# Allegro board test_fix_2.brd

Outline 87.88 x 112.52 mm; copper layers: TOP, POWER, MIDDLE, GND, BOTTOM. Coordinates in mm from the lower left corner of the outline.
Outline path: rectangle 0,0 87.88,112.52

## Design rules (mm)
nets with their own width: min track width 0.127; nets MISO2 MOSI1 MOSI2 N119290 N119334 N119492 N119544 N119576 N119584 N172861 N172869 N172885 N174712 N174716 N174732 N174736 N174786 N174790 OUTA PTA1 PTA2 PTA3 PTA4 PTA5 PTA6 PTA7 PTB2 PTB3 PTB4 PTB5 PTC0 PTC1 PTC2 PTC3 PTC4 PTC5 PTD4 PTD5 PTD6 PTD7 PTE2 PTE4 PTE5 PTE6 PTE7 PTF0 PTF1 PTF2 PTF3 PTF4 PTF5 PTF6 PTF7 PTG0 PTG1 PTG2 PTG3 PTH0 PTH1 R1IN R1OUT R2IN R2OUT SCL1 SCL2 SDA1 SDA2 SPSCK1 SPSCK2 SS1_N SS2_N T1OUT T2OUT TXD1 TXD2 VIN VOUT
nets with their own width: min track width 0.178; nets V3_3 V5_5 VCC
nets with their own width: min track width 0.229; nets AGND VREFL VSS

## Placement (name value [footprint] x y rotation side)
C7  0.1u  [CAP196]  25.91 55.12 0 top
C8  0.1u  [CAP196]  65.53 47.5 180 top
C14  2u  [CAP196]  11.68 75.18 180 top
C15  0.1u  [CAP196]  13.97 97.79 270 top
C16  0.1u  [CAP196]  21.08 97.79 270 top
C17  0.1u  [CAP196]  30.73 97.79 90 top
C18  10u  [CAP196]  56.39 55.12 0 top
C19  0.1u  [CAP196]  35.31 97.79 270 top
C20  10u  [CAP196]  42.42 97.79 270 top
C21  0.1u  [CAP196]  53.34 75.69 0 top
C22  0.1u  [CAP196]  32.77 55.12 0 top
C26  10u  [CAP196]  61.47 75.69 0 top
C27  0.47u  [CAP196]  61.47 68.58 0 top
C28  33u  [CAP196]  53.34 71.12 180 top
C29  0.1u  [CAP196]  56.39 29.46 180 top
C30  0.1u  [CAP196]  56.39 22.1 180 top
C31  0.1u  [CAP196]  56.39 37.59 180 top
C32  0.1u  [CAP196]  56.39 10.67 0 top
C33  1n  [CAP196]  49.28 55.12 0 top
C34  10u  [CAP196]  44.7 64.26 180 top
C35  0.1u  [CAP196]  65.53 57.66 180 top
D4  LED  [CAP196]  21.84 81.79 0 top
D5  LED  [CAP196]  29.97 81.79 0 top
D6  LED  [CAP196]  38.1 81.79 0 top
J1  CON2  [JUMPER2]  18.03 72.64 90 top
J2  HEADER 8  [JUMPER8]  9.14 13.72 0 top
J3  HEADER 8  [JUMPER8]  9.14 27.94 0 top
J4  HEADER 8  [JUMPER8]  9.14 42.16 0 top
J5  HEADER 8  [JUMPER8]  9.14 56.39 0 top
J6  HEADER 8  [JUMPER8]  76.2 13.72 0 top
J7  HEADER 8  [JUMPER8]  76.2 27.94 0 top
J8  HEADER 8  [JUMPER8]  76.2 42.16 0 top
J9  HEADER 8  [JUMPER8]  76.2 56.39 0 top
J10  HEADER 8  [JUMPER8]  68.07 69.34 0 top
NOREF  -  [unnamed]  85.34 2.54 0 top
NOREF#2  -  [unnamed]  85.34 109.98 0 top
NOREF#3  -  [unnamed]  2.54 2.54 0 top
NOREF#4  -  [unnamed]  2.54 109.98 0 top
NOREF#5  -  [#2]  87.88 0 90 top
NOREF#6  -  [#2]  0 112.52 0 top
R4  1k  [RES400]  37.59 68.33 0 top
R5  100k  [RES400]  13.72 92.46 270 top
R6  100k  [RES400]  38.1 92.46 90 top
R7  1.26k  [RES400]  52.07 92.46 90 top
R8  22.17k  [RES400]  38.1 103.38 90 top
R9  11.1k  [RES400]  41.91 103.38 270 top
R10  10k  [RES400]  18.29 32.26 180 top
R11  10k  [RES400]  18.29 46.99 180 top
R12  10k  [RES400]  36.83 41.91 0 top
R13  10k  [RES400]  42.67 41.91 0 top
R14  10k  [RES400]  71.63 52.07 180 top
R16  1k  [RES400]  59.94 52.07 180 top
R17  1k  [RES400]  22.86 77.98 180 top
U2  MC9S08QE128_64  [MC9S08QE128_V2]  17.27 31.5 0 top
U3  CAT24C02  [DIP8_3]  24.38 50.55 0 top
U4  LT323/TO220  [TO220AB]  30.23 70.36 270 top
U5  LM3940/TO220  [TO220AB]  44.2 75.69 90 top
U6  max550acpa  [DIP8_3]  47.75 50.55 0 top
U7  MAX3222  [DIP18_3]  63.25 35.56 0 top
U8  LM124A  [DIP14_3]  58.17 93.98 90 top

## Library data of the parts
C7 C8 C14-C22 C26-C28 C35 = C: Tolerance: ***; User Part Number: ***
C29-C34 = CAP: Tolerance: ***; User Part Number: ***
D4-D6 = LED: Tolerance: ***; User Part Number: ***
J1 = CON2: User Part Number: ***
J2-J10 = HEADER 8: User Part Number: ***
R4-R9 R16 R17 = R: Tolerance: ***; User Part Number: ***
R10-R14 = RESISTOR: Tolerance: ***; User Part Number: ***
U2 = MC9S08QE128_7
U3 = CAT24C02_3: Tolerance: ***; User Part Number: ***
U4 = LT323/TO220_0
U5 = LM3940/TO220_0
U6 = max550acpa_0: Tolerance: ***; User Part Number: ***
U7 = MAX3222_2: Tolerance: ***; User Part Number: ***
U8 = LM124A: Tolerance: ***; User Part Number: ***

## Footprints (pads in the part's own frame, mm; a bottom-side part is the same pattern mirrored in y, then rotated)
CAP196
  round 1.524 hole 0.914: 1(0,0) 2(0,2.54)
DIP8_3
  rect 1.524x1.524 hole 0.914: 1(0,0)
  round 1.524 hole 0.914: 2(0,-2.54) 3(0,-5.08) 4(0,-7.62) 5(7.62,-7.62) 6(7.62,-5.08) 7(7.62,-2.54) 8(7.62,0)
DIP14_3
  rect 1.524x1.524 hole 0.914: 1(0,0)
  round 1.524 hole 0.914: 2(0,-2.54) 3(0,-5.08) 4(0,-7.62) 5(0,-10.16) 6(0,-12.7) 7(0,-15.24) 8(7.62,-15.24) 9(7.62,-12.7) 10(7.62,-10.16) 11(7.62,-7.62) 12(7.62,-5.08) 13(7.62,-2.54) 14(7.62,0)
DIP18_3
  rect 1.524x1.524 hole 0.914: 1(0,0)
  round 1.524 hole 0.914: 2(0,-2.54) 3(0,-5.08) 4(0,-7.62) 5(0,-10.16) 6(0,-12.7) 7(0,-15.24) 8(0,-17.78) 9(0,-20.32) 10(7.62,-20.32) 11(7.62,-17.78) 12(7.62,-15.24) 13(7.62,-12.7) 14(7.62,-10.16) 15(7.62,-7.62) 16(7.62,-5.08) 17(7.62,-2.54) 18(7.62,0)
JUMPER2
  round 1.524 hole 0.914: 1(0,0) 2(2.54,0)
JUMPER8
  round 1.524 hole 0.914: 1(0,0) 2(2.54,0) 3(0,2.54) 4(2.54,2.54) 5(0,5.08) 6(2.54,5.08) 7(0,7.62) 8(2.54,7.62)
MC9S08QE128_V2
  round 1.524 hole 1.067: 1(8.026,0) 2(10.033,0) 3(8.026,-2.007) 4(10.033,-2.007) 5(8.026,-4.013) 6(10.033,-4.013) 7(8.026,-6.02) 8(10.033,-6.02) 9(8.026,-8.026) 10(10.033,-8.026) 11(8.026,-10.033) 12(10.033,-10.033) 13(8.026,-12.04) 14(10.033,-12.04) 15(8.026,-14.046) 16(10.033,-14.046) 17(12.04,-20.066) 18(12.04,-18.059) 19(14.046,-20.066) 20(14.046,-18.059) 21(16.053,-20.066) 22(16.053,-18.059) 23(18.059,-20.066) 24(18.059,-18.059) 25(20.066,-20.066) 26(20.066,-18.059) 27(22.073,-20.066) 28(22.073,-18.059) 29(24.079,-20.066) 30(24.079,-18.059) 31(26.086,-20.066) 32(26.086,-18.059) 33(32.664,-14.046) 34(30.658,-14.046) 35(32.664,-12.04) 36(30.658,-12.04) 37(32.664,-10.033) 38(30.658,-10.033) 39(32.664,-8.026) 40(30.658,-8.026) 41(32.664,-6.02) 42(30.658,-6.02) 43(32.664,-4.013) 44(30.658,-4.013) 45(32.664,-2.007) 46(30.658,-2.007) 47(32.664,0) 48(30.658,0) 49(26.086,5.359) 50(26.086,3.353) 51(24.079,5.359) 52(24.079,3.353) 53(22.073,5.359) 54(22.073,3.353) 55(20.066,5.359) 56(20.066,3.353) 57(18.059,5.359) 58(18.059,3.353) 59(16.053,5.359) 60(16.053,3.353) 61(14.046,5.359) 62(14.046,3.353) 63(12.04,5.359) 64(12.04,3.353)
RES400
  round 1.651 hole 1.067: 1(0,0) 2(0,10.16)
TO220AB
  round 2.032 hole 1.397: 1(0,0) 2(-2.54,0) 3(-5.08,0)
unnamed
  round 0.635 hole 3.175 unplated: (0,0)

## Nets
AGND: C14.1 C15.1 C16.1 C21.1 C26.1 C27.1 C28.1 C31.2 C32.2 C33.2 C35.1 D4.2(CATHODE) D5.2(CATHODE) D6.2(CATHODE) J1.2 J10.1 R6.1 U4.2 U5.2 U6.1(GND) U7.16 U8.11(V-)
V3_3: C7.2 C22.2 C28.2 C33.1 C34.1 C35.2 J2.6 J2.7 J2.8 J10.3 J10.4 J10.5 R10.1 R11.1 R12.2 R13.2 R14.1 R16.2 U2.6(VDD) U2.7(VDDAD) U2.8(VREFH) U2.40(VDD_2) U3.8 U5.3(OUT) U6.6(LDAC_N) U6.7(REF) U6.8(VDD) U7.1(E\N\) U7.17(VCC) U7.18(S\H\D\N\)
V5_5: C21.2 C26.2 C27.2 J10.6 J10.7 J10.8 R4.2 R5.2 U4.3(VOUT) U5.1(IN) U8.4(V+)
VCC: C14.2 J1.1 R17.2 U4.1(VIN)
VIN: C18.1 J9.8
VSS: U2.41 U3.4
MISO2: J6.6 U2.46(PTD2/KBI2P2/MISO2)
MOSI1: J9.4 U2.59(PTE1/MOSI1) U6.4(DIN)
MOSI2: J2.1 U2.1(PTD1/KBI2P1/MOSI2)
OUTA: J10.2 U6.2(OUTA)
PTA1: J7.1 U2.49(PTA1/KBI1P1/TPM2CH0/ADP1/ACMP1)
PTA2: J6.8 U2.48(PTA2/KBI1P2/SDA11/ADP2)
PTA3: J6.7 U2.47(PTA3/KBI1P3/SCL1/ADP3)
PTA4: J8.1 U2.64(PTA4/ACMP1O/BKGD/MS)
PTA5: C8.2 J7.8 R14.2 U2.63(PTA5/IRQ/TPM1CLK/R\E\S\E\T\\)
PTA6: J5.8 U2.38(PTA6/TPM1CH2/ADP8)
PTA7: J8.5 U2.37(PTA7/TPM2CH2/ADP9)
PTB2: J9.3 U2.32(PTB2/KBI1P6/SPSCK1/ADP6)
PTB3: J9.2 U2.31(PTB3/KBI1P7/MOSI1/ADP7)
PTB4: J4.3 U2.19(PTB4/TPM2CH1/MISO1)
PTB5: J4.2 U2.18(PTB5/TPM1CH1/SS1\)
PTC0: J5.2 U2.26(PTC0/TPM3CH0)
PTC1: J5.1 U2.25(PTC1/TPM3CH1)
PTC2: J4.5 U2.21(PTC2/TPM3CH2)
PTC3: J4.4 U2.20(PTC3/TPM3CH3)
PTC4: J9.6 U2.62(PTC4/TPM3CH4/R\S\T\O\)
PTC5: J9.7 U2.61(PTC5/TPM3CH5/ACMP2O)
PTD4: J6.5 U2.44(PTD4/KBI2P4)
PTD5: J4.8 U2.24(PTD5/KBI2P5)
PTD6: J4.7 U2.23(PTD6/KBI2P6)
PTD7: J4.6 U2.22(PTD7/KBI2P7)
PTE2: J5.7 U2.54(PTE2/MISO1)
PTE4: J8.2 U2.39(PTE4)
PTE5: J4.1 U2.17(PTE5)
PTE6: J3.8 U2.16(PTE6)
PTE7: J2.5 U2.5(PTE7/TPM3CLK)
PTF0: J8.8 U2.43(PTF0/ADP10)
PTF1: J8.7 U2.42(PTF1/ADP11)
PTF2: J6.4 U2.36(PTF2/ADP12)
PTF3: J6.3 U2.35(PTF3/ADP13)
PTF4: J9.1 U2.30(PTF4/ADP14)
PTF5: J8.4 U2.29(PTF5/ADP15)
PTF6: J8.3 U2.28(PTF6/ADP16)
PTF7: J5.3 U2.27(PTF7/ADP17)
PTG0: J5.6 U2.58(PTG0)
PTG1: J5.5 U2.57(PTG1)
PTG2: J5.4 U2.56(PTG2/ADP18)
PTG3: J7.7 U2.55(PTG3/ADP19)
PTH0: J3.7 U2.15(PTH0)
PTH1: J3.6 U2.14(PTH1)
R1IN: J6.2 U7.14(R1IN)
R1OUT: U2.34(PTB0/KBI1P4/RXD1/ADP4) U7.13(R1OUT)
R2IN: J7.5 U7.9(R2IN)
R2OUT: U2.52(PTC6/RXD2/ACMP2+) U7.10(R2OUT)
SCL1: J3.4 R11.2 U2.12(PTB7/SCL1/EXTAL)
SCL2: J2.4 R13.1 U2.4(PTH6/SCL2) U3.6(SCL)
SDA1: J3.5 R10.2 U2.13(PTB6/SDA1/XTAL)
SDA2: J2.3 R12.1 U2.3(PTH7/SDA2) U3.5(SDA)
SPSCK1: J9.5 U2.60(PTE0/TPM2CLK/SPSCK1) U6.5(SCLK)
SPSCK2: J2.2 U2.2(PTD0/KBI2P0/SPSCK2)
SS1_N: J7.6 U2.53(PTE3/S\S\1\) U6.3(CS_N)
SS2_N: J7.2 U2.45(PTD3/KBI2P3/S\S\2\)
T1OUT: J6.1 U7.15(T1OUT)
T2OUT: J7.4 U7.8(T2OUT)
TXD1: U2.33(PTB1/KBI1P5/TXD1/ADP5) U7.12(T1IN)
TXD2: U2.51(PTC7/TXD2/ACMP2-) U7.11(T2IN)
VOUT: C20.2 J7.3 U2.50(PTA0/KBI1P0/TPM1CH0/ADP0/ACMP1)
VREFL: C7.1 C8.1 C22.1 C34.2 J3.1 J3.2 J3.3 J8.6 U2.9(VREFL) U2.10(VSSAD) U2.11(VSS_2) U3.1(A0) U3.2(A1) U3.3(A2)
N119290: C15.2 R5.1 R6.2 U8.2(-)
N119334: C16.2 R7.2 U8.1(OUT) U8.3(+) U8.5(+)
N119492: C17.1 C19.1 R7.1 R9.1
N119544: C17.2 R8.2 U8.6(-)
N119576: C19.2 C20.1 R8.1 U8.7(OUT)
N119584: C18.2 R9.2
N172861: D4.1(ANODE) R17.1
N172869: D6.1(ANODE) R16.1
N172885: D5.1(ANODE) R4.1
N174712: C29.1 U7.2(C1+)
N174716: C29.2 U7.4(C1-)
N174732: C30.1 U7.5(C2+)
N174736: C30.2 U7.6(C2-)
N174786: C31.1 U7.3(V+)
N174790: C32.1 U7.7(V-)

Pads without a net: U3 7; U8 8 9 10 12 13 14

## Via types
v1: diameter 0.61, hole 0.33, TOP to BOTTOM, 46 vias

## Routing (per net, layer and track width the routed paths; a pad name or vN(x,y) marks a point on that pad's centre or on a via; arc(x,y) is an arc through that point)
AGND: length 319.7
  TOP w0.229: 28.97,84.33 D5.2 D6.2 ; 28.97,84.33 D4.2 ; 28.97,84.33 28.97,74.16 U4.2 33.45,72.9 33.49,72.86 43.9,72.86 U5.2 53.34,73.15 ; 62.66,69.34 62.66,74.5 C26.1 C21.1 53.34,73.15 ; 62.66,69.34 61.9,68.58 C27.1 ; 62.66,69.34 J10.1 ; 53.34,73.15 C28.1 ; C31.2 56.39,34.02 ; 56.39,34.02 67.09,34.02 70.64,30.48 U7.16 ; 56.39,34.02 v1(46.3,34.02) ; C15.1 14.97,98.79 20.08,98.79 C16.1 ; J1.2 C14.1
  MIDDLE w0.229: 20.14,84.33 18.03,82.22 J1.2 ; 20.14,84.33 D4.2 ; 20.14,84.33 20.14,96.85 C16.1 ; C26.1 64.54,78.77 64.54,100.36 U8.11 ; v1(46.3,34.02) 46.3,49.1 U6.1 47.75,56.13 C33.2 ; C32.2 55.45,14.15 55.45,34.11 C31.2 ; D6.2 R6.1
  GND w0.229: 60.59,75.69 C26.1 ; C26.1 61.47,74.82 ; C26.1 62.34,75.69 ; C31.2 57.26,35.05 ; C31.2 55.51,35.05 ; C31.2 56.39,35.93 ; C31.2 56.39,34.18 ; 37.22,84.33 D6.2 ; D6.2 38.1,83.45 ; D6.2 38.1,85.2 ; D6.2 38.98,84.33 ; C15.1 14.85,97.79 ; C15.1 13.09,97.79 ; C15.1 13.97,98.67 ; C15.1 13.97,96.91 ; 53.34,74.82 C21.1 ; C21.1 53.34,76.57 ; C21.1 54.22,75.69 ; C21.1 52.46,75.69 ; U6.1 48.63,50.55 ; U6.1 47.75,49.67 ; U6.1 46.88,50.55 ; U6.1 47.75,51.42 ; 48.4,57.66 C33.2 ; C33.2 49.28,58.53 ; C33.2 49.28,56.78 ; C33.2 50.15,57.66 ; U8.11 65.79,102.48 ; U8.11 66.66,101.6 ; U8.11 65.79,100.72 ; U8.11 64.91,101.6 ; C16.1 21.08,98.67 ; C16.1 21.08,96.91 ; C16.1 21.96,97.79 ; C16.1 20.21,97.79 ; 29.1,84.33 D5.2 ; D5.2 29.97,83.45 ; D5.2 30.85,84.33 ; D5.2 29.97,85.2 ; 37.22,92.46 R6.1 ; R6.1 38.1,91.58 ; R6.1 38.98,92.46 ; R6.1 38.1,93.33 ; 29.22,72.9 U4.2 ; U4.2 30.23,73.9 ; U4.2 31.23,72.9 ; U4.2 30.23,71.89 ; D4.2 21.84,85.2 ; D4.2 20.97,84.33 ; D4.2 21.84,83.45 ; D4.2 22.72,84.33 ; C27.1 62.34,68.58 ; C27.1 61.47,67.7 ; C27.1 61.47,69.46 ; C27.1 60.59,68.58 ; C28.1 54.22,71.12 ; C28.1 53.34,70.24 ; C28.1 53.34,72 ; C28.1 52.46,71.12 ; 55.51,13.21 C32.2 ; C32.2 56.39,12.33 ; C32.2 57.26,13.21 ; C32.2 56.39,14.08 ; J1.2 18.03,76.06 ; J1.2 17.16,75.18 ; J1.2 18.03,74.31 ; J1.2 18.91,75.18 ; 65.53,56.78 C35.1 ; C35.1 64.66,57.66 ; C35.1 65.53,58.53 ; C35.1 66.41,57.66 ; 67.2,69.34 J10.1 ; J10.1 68.95,69.34 ; J10.1 68.07,68.47 ; U5.2 45.2,73.15 ; U5.2 44.2,74.16 ; U5.2 43.19,73.15 ; U5.2 44.2,72.15 ; C14.1 11.68,76.06 ; C14.1 12.56,75.18 ; C14.1 10.81,75.18 ; C14.1 11.68,74.31 ; U7.16 70.87,31.36 ; U7.16 70.87,29.6 ; U7.16 71.74,30.48 ; U7.16 69.99,30.48
  BOTTOM w0.229: C28.1 49.28,67.06 C33.2
V3_3: length 211.6
  TOP w0.178: v1(51.75,68.58) C28.2 ; v1(61.53,41.91) R16.2 ; U5.3 45.39,70.61 45.43,70.57 v1(51.52,70.57) ; C22.2 31.79,56.68 23,56.68 22.8,56.88 v1(22.28,56.88) ; v1(16.7,46.99) R11.1 ; v1(22.8,52.07) R12.2 ; v1(61.66,35.56) U7.1 ; v1(73.22,35.56) U7.18 ; v1(7.51,21.34) J2.7 ; v1(73.22,33.02) U7.17 ; v1(19.93,32.26) R10.1 ; v1(14.77,18.8) J2.6 ; v1(73.22,52.07) R14.1
  POWER w0.178: R13.2 42.67,52.95 ; R13.2 41.8,52.07 ; R13.2 43.55,52.07 ; R13.2 42.67,51.19 ; 27.31,26.61 U2.6 ; U2.6 28.18,27.48 ; U2.6 27.31,28.36 ; U2.6 26.43,27.48 ; J2.8 11.68,22.21 ; J2.8 11.68,20.46 ; J2.8 10.81,21.34 ; J2.8 12.56,21.34 ; U7.18 70.87,36.44 ; U7.18 69.99,35.56 ; U7.18 71.74,35.56 ; U7.18 70.87,34.68 ; 70.61,71.01 J10.4 ; J10.4 69.74,71.88 ; J10.4 70.61,72.76 ; J10.4 71.49,71.88 ; 31.89,57.66 C22.2 ; C22.2 33.64,57.66 ; C22.2 32.77,56.78 ; C22.2 32.77,58.53 ; R12.2 36.83,52.95 ; R12.2 36.83,51.19 ; R12.2 37.71,52.07 ; R12.2 35.95,52.07 ; 54.5,48.01 U6.7 ; U6.7 55.37,48.88 ; U6.7 56.25,48.01 ; U6.7 55.37,47.13 ; 25.03,57.66 C7.2 ; C7.2 25.91,56.78 ; C7.2 26.78,57.66 ; C7.2 25.91,58.53 ; 8.27,21.34 J2.7 ; J2.7 9.14,20.46 ; J2.7 9.14,22.21 ; J2.7 10.02,21.34 ; 68.07,71.01 J10.3 ; J10.3 67.2,71.88 ; J10.3 68.95,71.88 ; J10.3 68.07,72.76 ; 68.07,73.55 J10.5 ; J10.5 68.95,74.42 ; J10.5 68.07,75.3 ; J10.5 67.2,74.42 ; 63.25,34.68 U7.1 ; U7.1 63.25,36.44 ; U7.1 62.37,35.56 ; U7.1 64.12,35.56 ; U5.3 44.2,71.62 ; U5.3 44.2,69.61 ; U5.3 43.19,70.61 ; U5.3 45.2,70.61 ; 65.53,54.24 C35.2 ; C35.2 65.53,55.99 ; C35.2 64.66,55.12 ; C35.2 66.41,55.12 ; R11.1 19.16,46.99 ; R11.1 18.29,47.87 ; R11.1 17.41,46.99 ; R11.1 18.29,46.11 ; U2.40 47.93,24.35 ; U2.40 47.05,23.47 ; U2.40 47.93,22.59 ; U2.40 48.81,23.47 ; U6.6 56.25,45.47 ; U6.6 55.37,46.34 ; U6.6 55.37,44.59 ; U6.6 54.5,45.47 ; C28.2 54.22,68.58 ; C28.2 52.46,68.58 ; C28.2 53.34,69.46 ; C28.2 53.34,67.7 ; C34.1 44.7,65.14 ; C34.1 43.83,64.26 ; C34.1 45.58,64.26 ; C34.1 44.7,63.39 ; R10.1 18.29,33.13 ; R10.1 19.16,32.26 ; R10.1 17.41,32.26 ; R10.1 18.29,31.38 ; R14.1 72.5,52.07 ; R14.1 70.75,52.07 ; R14.1 71.63,52.95 ; R14.1 71.63,51.19 ; R16.2 60.82,41.91 ; R16.2 59.94,42.79 ; R16.2 59.94,41.03 ; R16.2 59.07,41.91 ; J2.6 11.68,19.67 ; J2.6 11.68,17.92 ; J2.6 12.56,18.8 ; J2.6 10.81,18.8 ; U6.8 55.37,51.42 ; U6.8 54.5,50.55 ; U6.8 56.25,50.55 ; U6.8 55.37,49.67 ; 70.87,32.14 U7.17 ; U7.17 69.99,33.02 ; U7.17 70.87,33.9 ; U7.17 71.74,33.02 ; U2.7 25.3,26.35 ; U2.7 26.18,25.48 ; U2.7 24.42,25.48 ; U2.7 25.3,24.6 ; 48.4,55.12 C33.1 ; C33.1 49.28,55.99 ; C33.1 50.15,55.12 ; C33.1 49.28,54.24 ; 26.43,25.48 U2.8 ; U2.8 27.31,24.6 ; U2.8 28.18,25.48 ; U2.8 27.31,26.35 ; U3.8 32.88,50.55 ; U3.8 32,51.42 ; U3.8 31.13,50.55 ; U3.8 32,49.67
  MIDDLE w0.178: v1(68.07,70.69) J10.3 J10.5 ; v1(22.8,57.66) C7.2 ; v1(22.8,49.63) 31.09,49.63 U3.8 ; U2.40 48.84,22.56 v1(51.52,22.56)
  BOTTOM w0.178: v1(73.22,71.88) J10.4 ; v1(68.07,70.69) J10.3 ; v1(52.32,55.12) C33.1 ; U2.8 26.33,24.5 v1(22.8,24.5) ; v1(22.8,25.48) U2.7 ; v1(57.98,50.55) U6.8 ; v1(22.8,28.04) 23.32,28.04 23.74,28.46 26.33,28.46 U2.6 ; v1(14.77,21.34) J2.8 ; R13.2 50.99,52.07 v1(51.52,51.54)
V5_5: length 76.8
  TOP w0.178: v1(61.47,72.71) C27.2 ; v1(39.24,73.41) 44.07,78.23 C21.2 ; J10.6 v1(70.61,75.62) J10.8 ; v1(23.88,90.87) R5.2
  POWER w0.178: 69.74,76.96 J10.8 ; J10.8 71.49,76.96 ; J10.8 70.61,76.09 ; J10.8 70.61,77.84 ; U4.3 31.23,75.44 ; U4.3 30.23,74.43 ; U4.3 29.22,75.44 ; U4.3 30.23,76.44 ; 44.2,74.69 U5.1 ; U5.1 43.19,75.69 ; U5.1 44.2,76.7 ; U5.1 45.2,75.69 ; 67.2,76.96 J10.7 ; J10.7 68.95,76.96 ; J10.7 68.07,77.84 ; C27.2 62.34,71.12 ; C27.2 61.47,72 ; C27.2 61.47,70.24 ; C27.2 60.59,71.12 ; 23,92.46 R5.2 ; R5.2 24.75,92.46 ; R5.2 23.88,93.33 ; R5.2 23.88,91.58 ; R4.2 37.59,79.36 ; R4.2 37.59,77.61 ; R4.2 36.72,78.49 ; R4.2 38.47,78.49 ; 60.59,78.23 C26.2 ; C26.2 61.47,79.11 ; C26.2 61.47,77.36 ; C26.2 62.34,78.23 ; 53.34,77.36 C21.2 ; C21.2 54.22,78.23 ; C21.2 52.46,78.23 ; C21.2 53.34,79.11 ; 70.61,75.3 J10.6 71.49,74.42 ; 64.91,93.98 U8.4 ; U8.4 66.66,93.98 ; U8.4 65.79,94.86 ; U8.4 65.79,93.1
  MIDDLE w0.178: v1(65.79,95.57) U8.4 ; v1(37.59,77.23) R4.2 ; U5.1 40.27,75.69 v1(37.99,73.41)
  BOTTOM w0.178: v1(61.47,77.04) C26.2 ; v1(66.88,76.96) J10.7 ; v1(35.05,73.41) 33.02,75.44 U4.3
VCC: length 21
  TOP w0.178: v1(24.45,67.82) R17.2 ; v1(10.1,72.64) C14.2 ; v1(19.62,72.64) J1.1
  POWER w0.178: 30.23,69.35 U4.1 ; U4.1 31.23,70.36 ; U4.1 29.22,70.36 ; U4.1 30.23,71.36 ; 18.03,71.77 J1.1 ; J1.1 18.03,73.52 ; J1.1 17.16,72.64 ; J1.1 18.91,72.64 ; R17.2 22.86,68.69 ; R17.2 23.74,67.82 ; R17.2 22.86,66.94 ; R17.2 21.98,67.82 ; 11.68,71.77 C14.2 ; C14.2 12.56,72.64 ; C14.2 11.68,73.52 ; C14.2 10.81,72.64
  MIDDLE w0.178: v1(31.94,70.36) U4.1
VIN: length 30.6
  MIDDLE w0.127: J9.8 77.6,62.87 77.6,56.53 75.17,54.1 57.4,54.1 C18.1
VSS: length 35.5
  TOP w0.229: U3.4 24.38,38.36 36.26,26.48 48.93,26.48 U2.41
MISO2: length 36.1
  TOP w0.127: J6.6 77.53,20 76.19,20 72.58,23.61 72.58,25.03 71.01,26.61 59.88,26.61 58.05,28.44 48.98,28.44 U2.46
MOSI1: length 63.6
  TOP w0.127: U6.4 46.79,42.93 ; 46.79,42.93 45.72,43.99 45.72,50.31 48.75,53.34 74.93,53.34 77.41,55.82 77.41,57.59 J9.4 ; 46.79,42.93 43.66,39.8 34.17,39.8 33.32,38.95 U2.59
MOSI2: length 30.3
  TOP w0.127: U2.1 19.81,26.01 19.81,22.19 17.63,20 9,20 8.19,19.19 8.19,14.67 J2.1
OUTA: length 43.5
  BOTTOM w0.127: U6.2 49.21,46.55 65.93,46.55 70.61,51.23 J10.2
PTA1: length 39.7
  TOP w0.127: J7.1 74.47,29.67 74.47,35 72.96,36.51 44.31,36.51 43.97,36.86 U2.49
PTA2: length 40.5
  BOTTOM w0.127: U2.48 48.98,30.44 60.11,30.44 61.15,29.4 78.63,29.4 79.69,28.33 79.69,22.29 J6.8
PTA3: length 32
  TOP w0.127: U2.47 59.63,31.5 61.98,29.15 71.01,29.15 73.34,26.81 73.34,24.19 J6.7
PTA4: length 52.7
  TOP w0.127: J8.1 73.09,39.05 37.49,39.05 36.28,37.85 36.28,34.45 35.73,33.9 30.26,33.9 U2.64
PTA5: length 66.5
  TOP w0.127: R14.2 68.58,44.96 C8.2
  BOTTOM w0.127: R14.2 71.63,38.54 ; 71.63,38.54 41.69,38.54 40.3,37.15 40.3,34.45 39.74,33.9 36.94,33.9 36.28,34.56 36.28,35.24 35.73,35.8 30.37,35.8 U2.63 ; 71.63,38.54 75.76,38.54 J7.8
PTA6: length 61.9
  TOP w0.127: U2.38 40.47,21.46 21.18,40.75 21.18,54.51 J5.8
PTA7: length 49.6
  MIDDLE w0.127: J8.5 75.31,46.36 54.45,46.36 52.02,43.92 52.02,22.35 51.13,21.46 U2.37
PTB2: length 75.8
  MIDDLE w0.127: J9.3 47.75,58.93 44.75,55.93 44.75,14.83 U2.32
PTB3: length 82.8
  MIDDLE w0.127: J9.2 79.63,55.5 79.63,13.35 74.92,8.64 46.15,8.64 U2.31
PTB4: length 56.8
  TOP w0.127: J4.3 7.01,42.57 7.01,14.28 8.91,12.38 30.37,12.38 U2.19
PTB5: length 38.6
  MIDDLE w0.127: J4.2 14.28,39.57 14.28,24.08 24.92,13.44 U2.18
PTC0: length 62.8
  MIDDLE w0.127: U2.26 37.34,26.37 34.21,29.49 34.21,49.59 27.42,56.39 J5.2
PTC1: length 71.1
  MIDDLE w0.127: J5.1 10.29,55.25 10.29,13.86 11.82,12.32 36.45,12.32 U2.25
PTC2: length 61.2
  BOTTOM w0.127: J4.5 7.01,45.11 7.01,14.5 9.13,12.38 32.37,12.38 U2.21
PTC3: length 42.9
  MIDDLE w0.127: U2.20 30.06,14.69 24.43,14.69 15.27,23.86 15.27,41.53 12.09,44.7 J4.4
PTC4: length 68.6
  TOP w0.127: J9.6 77.41,60.13 42.86,60.13 39.62,56.9 39.62,42.91 36.77,40.06 33.22,40.06 32.27,39.11 32.27,35.8 U2.62
PTC5: length 69.8
  TOP w0.127: U2.61 31.32,39.46 32.75,40.89 37.25,40.89 39.12,42.76 39.12,62.48 40.64,64.01 43.61,64.01 44.31,63.31 45.1,63.31 45.8,64.01 J9.7
PTD4: length 32.7
  BOTTOM w0.127: J6.5 74.1,20.89 74.1,20.97 70.65,24.42 49.64,24.42 48.88,25.18 48.88,26.53 U2.44
PTD5: length 46.1
  BOTTOM w0.127: J4.8 35.33,26.14 U2.24
PTD6: length 65.4
  MIDDLE w0.127: U2.23 34.44,10.54 11.06,10.54 8.25,13.35 8.25,48.89 J4.7
PTD7: length 44.8
  MIDDLE w0.127: U2.22 33.32,16.7 27.67,22.35 24.13,22.35 19.43,27.05 19.43,39.5 J4.6
PTE2: length 50.9
  BOTTOM w0.127: U2.54 38.29,35.9 38.29,41.89 36.3,43.88 32.24,43.88 26.86,49.26 26.86,58.05 21.98,62.93 10.22,62.93 J5.7
PTE4: length 44.6
  TOP w0.127: v1(54.74,23.47) U2.39
  MIDDLE w0.127: J8.2 75.06,38.48 56.02,38.48 54.74,37.2 v1(54.74,23.47)
PTE5: length 49
  MIDDLE w0.127: U2.17 12.35,11.43 10.03,13.75 10.03,41.28 J4.1
PTE6: length 31.8
  BOTTOM w0.127: U2.16 28.26,18.4 28.26,29.88 27.7,30.44 16.8,30.44 J3.8
PTE7: length 25.6
  BOTTOM w0.127: U2.5 18.05,27.48 16.64,28.89 11.29,28.89 10.35,27.95 10.35,20 J2.5
PTF0: length 47.6
  MIDDLE w0.127: U2.43 51.33,28.88 51.33,45.22 55,48.89 77.85,48.89 J8.8
PTF1: length 48.1
  MIDDLE w0.127: U2.42 49,26.54 49,43.25 55.07,49.32 74.85,49.32 75.31,49.78 J8.7
PTF2: length 34.6
  BOTTOM w0.127: J6.4 77.41,14.92 73.6,14.92 72.96,14.29 51.75,14.29 48.88,17.16 48.88,18.5 U2.36
PTF3: length 27.6
  BOTTOM w0.127: J6.3 53.14,16.26 U2.35
PTF4: length 79.1
  TOP w0.127: v1(40.46,56.39) J9.1
  MIDDLE w0.127: U2.30 40.46,14.33 v1(40.46,56.39)
PTF5: length 61.6
  MIDDLE w0.127: U2.29 42.24,12.32 46.06,12.32 52.27,18.53 52.27,36.38 59.71,43.81 77.85,43.81 J8.4
PTF6: length 71.8
  TOP w0.127: U2.28 39.34,14.96 40.83,16.45 73.34,16.45 74.1,17.21 78.5,17.21 79.69,18.4 79.69,42.56 78.88,43.37 77.53,43.37 J8.3
PTF7: length 79.2
  MIDDLE w0.127: J5.3 8,57.78 8,13.24 10.96,10.29 38.2,10.29 U2.27
PTG0: length 42.2
  BOTTOM w0.127: U2.58 34.01,33.53 28.7,33.53 15.18,47.05 15.18,57.98 J5.6
PTG1: length 45.4
  BOTTOM w0.127: U2.57 32.31,39.88 23.11,39.88 16.2,46.78 16.2,60.8 14.58,62.42 10.1,62.42 J5.5
PTG2: length 47.8
  MIDDLE w0.127: J5.4 32.75,58.93 38.23,53.45 38.23,35.74 U2.56
PTG3: length 40.8
  TOP w0.127: J7.7 73.22,38.54 39.03,38.54 U2.55
PTH0: length 35.1
  BOTTOM w0.127: J3.7 8.19,34.61 8.19,18.4 9.14,17.45 U2.15
PTH1: length 36.3
  TOP w0.127: U2.14 28.51,20.66 28.51,31.64 27.7,32.45 21.5,32.45 20.68,33.27 17.87,33.27 14.12,29.53 11.29,29.53 10.73,30.09 10.73,32.07 J3.6
R1IN: length 18.5
  MIDDLE w0.127: J6.2 77.85,12.83 74.82,12.83 73.02,14.63 73.02,23.24 U7.14
R1OUT: length 25.2
  TOP w0.127: U2.34 48.88,18.4 56.76,18.4 59.88,21.53 69.53,21.53 U7.13
R2IN: length 24
  MIDDLE w0.127: J7.5 72.26,29.08 70.75,29.08 64.39,22.72 64.39,16.38 U7.9
R2OUT: length 48.9
  TOP w0.127: U7.10 69.91,16.19 42.09,16.19 41.85,15.95 v1(41.35,15.95)
  MIDDLE w0.127: U2.52 v1(41.35,15.95)
SCL1: length 31
  TOP w0.127: R11.2 18.03,36.83 J3.4
  MIDDLE w0.127: R11.2 19.18,35.94 19.18,26.33 24.93,20.57 26.42,20.57 U2.12
SCL2: length 55.3
  TOP w0.127: J2.4 19.73,16.26 23.55,20.07 23.55,27.08 24.9,28.44 26.25,28.44 U2.4
  MIDDLE w0.127: U3.6 28.19,41.66 28.19,30.38 U2.4
  BOTTOM w0.127: R13.1 39.12,45.47 U3.6
SDA1: length 23.1
  TOP w0.127: R10.2 18.29,22.68 11.82,29.15 11.31,29.15 10.35,30.11 10.35,31.81 J3.5
  BOTTOM w0.127: R10.2 20.93,19.46 U2.13
SDA2: length 48.3
  TOP w0.127: J2.3 10.35,17.46 17.63,17.46 20.57,20.41 20.57,24.76 U2.3 ; R12.1 35.81,42.93 U3.5
  MIDDLE w0.127: U2.3 26.19,28.6 27.67,28.6 30.2,31.13 30.2,41.12 U3.5
SPSCK1: length 60.5
  TOP w0.127: U2.60 34.28,35.8 34.28,37.41 36.42,39.55 51.99,39.55 U6.5
  BOTTOM w0.127: J9.5 72.72,57.99 72.72,48.29 67.35,42.93 U6.5
SPSCK2: length 30.1
  TOP w0.127: J2.2 17.55,13.72 23.8,19.97 23.8,25.32 24.9,26.43 27.6,26.43 28.26,27.09 28.26,30.54 U2.2
SS1_N: length 52.2
  TOP w0.127: v1(46.85,35.89) 40.31,35.89 U2.53
  MIDDLE w0.127: v1(46.85,35.89) 46.85,44.56 U6.3
  BOTTOM w0.127: J7.6 77.41,34.35 77.41,35.7 76.59,36.51 47.47,36.51 v1(46.85,35.89)
SS2_N: length 29.8
  BOTTOM w0.127: J7.2 77.79,28.89 59.88,28.89 59.5,28.51 50.91,28.51 U2.45
T1OUT: length 16.4
  MIDDLE w0.127: U7.15 74.3,24.51 74.3,15.62 J6.1
T2OUT: length 30.1
  BOTTOM w0.127: U7.8 64.2,18.73 72.83,18.73 73.72,17.84 79.13,17.84 79.95,18.66 79.95,29.27 J7.4
TXD1: length 22.1
  TOP w0.127: U2.33 59.11,17.45 60.64,18.99 69.53,18.99 U7.12
TXD2: length 44.2
  BOTTOM w0.127: U7.11 69.91,16.83 55.91,16.83 52.23,20.51 47.54,20.51 42.3,25.74 42.3,35.9 U2.51
VOUT: length 99.6
  MIDDLE w0.127: C20.2 44.96,97.16 45.21,96.9 45.21,65.99 44.37,65.15 44.34,65.15 43.81,64.63 43.81,63.89 44.5,63.21 44.5,62.78 43.81,62.09 43.81,61.35 44.5,60.67 44.5,35.99 U2.50
  BOTTOM w0.127: U2.50 52.41,34.85 55.58,31.69 74.99,31.69 J7.3
VREFL: length 129.6
  TOP w0.229: U2.10 U2.9 U2.11 ; J3.3 J3.1 J3.2 ; U3.1 U3.2 U3.3 ; J8.6 77.74,46.24 66.79,46.24 C8.1 ; C7.1 C22.1
  POWER w0.229: C34.2 39.37,61.72 C22.1
  MIDDLE w0.229: C7.1 25.91,52.07 U3.1 ; U2.9 23.44,25.32 23.44,44.53 U3.3
  BOTTOM w0.229: U2.9 16.15,23.47 J3.2 ; C22.1 38.12,55.12 43.87,49.36 63.67,49.36 C8.1
N119290: length 54.2
  TOP w0.127: v1(16.51,92.98) 15.99,92.46 R5.1
  MIDDLE w0.127: v1(16.51,92.98) C15.2
  BOTTOM w0.127: U8.2 59.75,94.93 29.4,94.93 27.94,93.47 ; 27.94,93.47 17.01,93.47 v1(16.51,92.98) ; 27.94,93.47 R6.2
N119334: length 50.1
  TOP w0.127: 41.91,93.98 U8.1 ; 41.91,93.98 R7.2 ; 41.91,93.98 27.43,93.98 C16.2
  BOTTOM w0.127: U8.5 67.37,93.03 63.25,93.03 ; U8.1 58.17,93.03 63.25,93.03 ; 63.25,93.03 U8.3
N119492: length 28.6
  TOP w0.127: R9.1 39.05,100.52 38.04,100.52 C19.1 C17.1
  MIDDLE w0.127: R9.1 48.64,96.65 48.64,95.89 R7.1
N119544: length 49.9
  TOP w0.127: C17.2 29.67,96.32 68.53,96.32 U8.6
  MIDDLE w0.127: C17.2 28.19,102.23 27.94,102.49 R8.2
N119576: length 42.8
  TOP w0.127: C19.2 C20.1 43.64,96.57 70.81,96.57 U8.7
  MIDDLE w0.127: C19.2 37.85,102.49 38.1,102.74 R8.1
N119584: length 47.5
  MIDDLE w0.127: R9.2 56.39,99.06 v1(56.39,76.24)
  BOTTOM w0.127: v1(56.39,76.24) C18.2
N172861: length 4.2
  TOP w0.127: D4.1 21.84,78.99 R17.1
N172869: length 46.6
  BOTTOM w0.127: D6.1 51.54,81.79 59.94,73.38 R16.1
N172885: length 16.6
  MIDDLE w0.127: D5.1 33.45,78.31 33.45,72.47 R4.1
N174712: length 11.3
  MIDDLE w0.127: U7.2 64.13,32.13 64.13,30.11 63.49,29.46 C29.1
N174716: length 7.3
  BOTTOM w0.127: U7.4 57.4,27.94 C29.2
N174732: length 8.2
  TOP w0.127: C30.1 59.69,25.4 U7.5
N174736: length 8.2
  TOP w0.127: U7.6 59.69,22.86 C30.2
N174786: length 10
  MIDDLE w0.127: U7.3 59.31,34.42 59.31,34.67 C31.1
N174790: length 12.5
  MIDDLE w0.127: U7.7 59.82,16.89 59.82,14.1 C32.1

## Copper pours and planes (outline as drawn; the poured copper is in the pictures)
AGND on GND: 5.08,5.08 5.08,107.44 82.8,107.44 82.8,66.29 18.03,66.29 18.03,71.12 17.53,71.12 17.53,65.79 82.8,65.79 82.8,5.08
V3_3 on POWER: 5.08,5.59 82.55,5.59 82.55,72.9 69.22,72.9 69.22,75.44 65.41,75.44 65.41,66.55 57.15,66.55 57.15,73.53 49.53,73.53 49.53,72.26 40.64,72.26 40.64,65.91 5.08,65.91
V5_5 on POWER: 5.08,107.19 5.08,79.88 26.67,79.88 26.67,74.17 34.29,74.17 34.29,66.55 40,66.55 40,74.17 57.78,74.17 57.78,69.72 64.77,69.72 64.77,76.07 69.85,76.07 69.85,73.53 82.55,73.53 82.55,107.19
VCC on POWER: 5.08,66.55 5.08,79.25 26.04,79.25 26.04,72.26 33.66,72.26 33.66,66.55

## Text on the board
Ref Des/Silkscreen Top: Polysoftique Inc. | Test Fixture | S/N 001
DIMENSION: FIGURE | SIZE | 13.0 | 36.0 | 42.0 | 55.0 | 125.0 | DRILL CHART: TOP to BOTTOM | ALL UNITS ARE IN MILS | PLATED | NON-PLATED | QTY | 46 | 170 | 90 | 6 | 4
